# Altium PCB S203-RA.PcbDoc (part 2 of 2)
Units mm, origin at the board's own origin, x right, y up, seen from the top; angles counter-clockwise.
Board outline 500 x 12 mm, 2 copper layers (Component Side, Solder Side), stack 0.271 mm thick; 39 components, 86 nets, 212 pads, 204 vias.
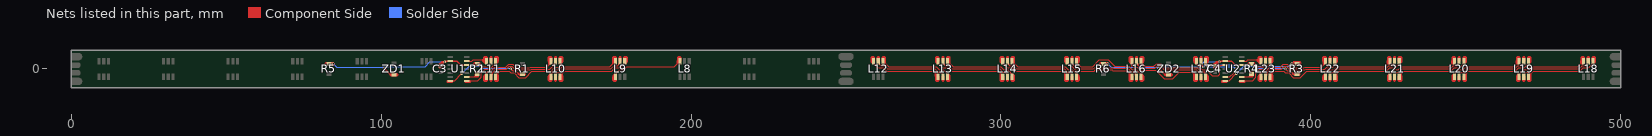
[diagram p2: the nets of this part, all layers, seen from the top]

## Via types
v1: diameter 0.8, hole 0.4, Component Side to Solder Side, 204 vias

## Nets (pads, with @x,y where several pads share a name; then routed paths per layer and width w, separated by ;. In a path a pad name is that pad's centre, name@x,y a point inside that pad or via, vN(x,y) a via of type N, cw(c..) or ccw(c..) an arc to the next point about the centre after c; other vN are vias at no path point) (continued)
NetL8_3: L8.3 L9.4 | length 29.2
  Component Side w0.35: L9.4@175.583,-2.487 cw(c177.814,-2.487) 176.237,-0.911 176.31,-0.838 cw(c177.603,-2.131) 177.603,-0.302 178.217,-0.302 179.205,0.686 194.59,0.686 195.563,1.658 ; 195.563,2.692 195.563,1.658 ; 195.896,1.991 cw(c196.188,1.699) L8.3@196.432,2.033 ; L8.3@196.101,2.09 cw(c195.606,2.212) 195.606,1.702 ; L8.3@196.172,1.702 195.606,1.702 ; L8.3@196.225,1.75 ccw(c195.944,1.364) 195.606,1.702 ; L8.3@196.417,2.513 196.051,2.147 195.606,1.702 ; 195.563,1.658 195.606,1.702
  Component Side w1: 175.051,-3.039 cw(c175.603,-3.039) L9.4@175.583,-2.487 ; 195.885,2.454 ccw(c196.318,2.454) L8.3@196.242,2.028 ; 195.885,3.647 ccw(c196.53,3.647) L8.3@196.417,3.013
NetL9_1: L9.1 L10.6 | length 27.2
  Component Side w0.35: L10.6@157.75,-2.2 158.614,-1.335 ; L10.6@157.766,-1.663 ccw(c157.821,-0.542) 158.614,-1.336 ; 158.422,-2.489 158.614,-2.297 158.614,-1.335 ; L9.1@178.583,1.798 L9.1@178.583,2.513 ; 179.115,2.658 cw(c178.321,2.658) 178.882,2.096 177.523,0.737 cw(c176.535,1.724) 176.535,0.328 175.437,0.328 174.41,-0.7 159.25,-0.7 158.614,-1.335
  Component Side w1: L10.6@157.75,-2.487 cw(c157.73,-3.039) 158.282,-3.039
NetL9_2: L9.2 L10.5 | length 24.8
  Component Side w0.35: L10.5@156.25,-2.487 156.25,-1.766 157.033,-0.982 157.792,-0.982 158.774,0 174.148,0 175.156,1.008 176.309,1.008 176.323,1.021 176.334,1.021 177.083,1.77 L9.2@177.083,2.513 ; 176.357,1.044 ccw(c175.388,2.013) L9.2@176.758,2.013
NetL9_3: L9.3 L10.4 | length 28.5
  Component Side w0.35: L10.4@154.75,-1.773 156.346,-0.178 157.508,-0.178 158.371,0.686 173.756,0.686 174.729,1.658 ; 174.729,2.692 174.729,1.658 ; 175.062,1.991 cw(c175.354,1.699) L9.3@175.598,2.033 ; L9.3@175.267,2.09 cw(c174.772,2.212) 174.772,1.702 ; L9.3@175.338,1.702 174.772,1.702 ; L9.3@175.391,1.75 ccw(c175.11,1.364) 174.772,1.702 ; L9.3@175.583,2.513 174.772,1.702 ; 174.729,1.658 174.772,1.702
  Component Side w1: 154.218,-3.039 cw(c154.77,-3.039) L10.4@154.75,-2.487 ; 175.051,2.454 ccw(c175.484,2.454) L9.3@175.408,2.028 ; 175.051,3.647 ccw(c175.696,3.647) L9.3@175.583,3.013
NetL10_1: L10.1 L11.6 | length 33.1
  Component Side w0.35: L11.6@136.917,-2.487 136.917,-1.783 137.94,-0.76 138.194,-0.76 ; L11.6@137.242,-1.987 cw(c138.52,-1.987) 137.616,-1.084 ; 137.43,-1.422 137.43,-1.981 137.582,-2.134 137.608,-2.108 137.608,-1.346 138.194,-0.76 ; 137.795,-2.287 137.795,-2.114 137.786,-2.105 137.786,-1.446 138.471,-0.76 ; L10.1@157.52,1.783 cw(c156.965,1.228) 157.75,1.228 cw(c158.535,1.228) L10.1@157.98,1.783 ; L10.1@157.75,2.513 157.75,1.159 157.093,0.502 156.029,0.502 154.801,-0.725 148.637,-0.725 146.571,-2.791 144.377,-2.791 142.88,-1.294 141.762,-1.294 141.228,-0.76 138.471,-0.76 ; 138.194,-0.76 138.471,-0.76
  Component Side w1: L11.6@136.917,-2.487 cw(c136.897,-3.039) 137.449,-3.039
NetL10_2: L10.2 L11.5 | length 27.8
  Component Side w0.35: L11.5@135.392,-1.987 cw(c136.129,-1.987) 135.608,-1.467 ; L11.5@135.417,-2.487 135.417,-1.657 137.014,-0.06 140.408,-0.06 141.373,0.905 142.123,0.905 142.962,0.066 143.514,0.066 143.905,-0.324 148.076,-0.324 148.356,-0.045 154.449,-0.045 156.25,1.756 L10.2@156.25,2.513 ; L11.5@135.742,-1.987 cw(c137.324,-1.987) 136.205,-0.869 ; 155.514,1.02 ccw(c154.521,2.013) L10.2@155.925,2.013
NetL10_3: L10.3 L11.4 | length 33.4
  Component Side w0.35: L11.4@133.698,-1.747 ccw(c133.248,-1.252) 133.917,-1.252 ; L11.4@133.917,-2.487 133.917,-1.252 ; L11.4@134.136,-1.747 cw(c134.586,-1.252) 133.917,-1.252 ; 154.093,1.337 cw(c154.795,1.337) L10.3@154.748,2.037 ; 154.093,1.711 cw(c154.77,1.711) L10.3@154.725,2.387 ; 154.093,2.085 cw(c154.745,2.085) L10.3@154.701,2.736 ; 154.093,2.363 154.093,1.193 ; 154.093,2.46 cw(c154.72,2.46) L10.3@154.678,3.085 ; L10.3@154.425,2.009 cw(c153.292,1.995) 154.093,1.193 ; L10.3@154.473,1.573 cw(c154.75,1.295) L10.3@154.75,1.687 ; L10.3@154.75,2.513 154.75,1.85 154.093,1.193 ; 133.917,-1.252 134.47,-0.7 135.377,-0.7 135.724,-0.352 135.728,-0.352 136.7,0.62 140.126,0.62 141.091,1.585 142.405,1.585 143.244,0.746 143.796,0.746 144.186,0.356 147.794,0.356 148.074,0.635 153.535,0.635 154.093,1.193
  Component Side w1: 133.385,-3.039 cw(c133.937,-3.039) L11.4@133.917,-2.487
NetL11_1: L11.1 U1.1 | length 13.6
  Component Side w0.35: U1.1@127.667,-3.81 131.207,-3.81 132.299,-2.718 132.299,-1.321 133.6,-0.02 135.095,-0.02 135.443,0.328 135.446,0.328 136.917,1.798 L11.1@136.917,2.513 ; U1.1@128.339,-3.911 cw(c128.583,-4.154) 128.583,-3.81 cw(c128.583,-3.466) U1.1@128.339,-3.709
NetL11_2: L11.2 R2.1 | length 14.6
  Component Side w0.35: R2.1@130.928,1.651 131.918,0.66 ; R2.1@131.064,1.191 cw(c131.064,0.41) 131.616,0.962 ; R2.1@131.093,1.192 cw(c131.175,-0.108) 132.096,0.813 131.766,1.143 ; R2.1@131.257,1.234 cw(c131.447,0.824) 131.766,1.143 ; R2.1@131.524,1.641 ccw(c132.871,1.613) 131.918,0.66 ; R2.1@131.639,2.108 131.766,1.981 ; L11.2@135.417,2.513 135.417,1.772 135.333,1.688 135.333,1.18 134.814,0.66 132.452,0.66 ; 131.766,1.143 131.766,1.981 ; 131.766,1.981 131.994,1.753 131.994,1.118 132.452,0.66 ; 131.918,0.66 132.452,0.66 ; R2.1@131.524,1.651 ccw(c132.167,1.651) 131.712,1.197 cw(c132.167,1.651) R2.1@131.524,1.651
  Component Side w1.2: 130.166,1.651 R2.1@130.928,1.651
NetL11_3: L11.3 U1.6 | length 13.3
  Component Side w0.35: U1.6@127.667,2.54 129.277,2.54 129.632,2.896 132.426,2.896 ; U1.6@128.339,2.439 cw(c128.583,2.196) 128.583,2.54 cw(c128.583,2.884) U1.6@128.339,2.641 ; 133.147,2.896 132.633,2.896 ; 133.409,3.672 133.385,3.648 132.633,2.896 ; L11.3@133.687,2.283 ccw(c133.132,1.728) 133.132,2.513 ccw(c133.132,3.297) L11.3@133.687,2.742 ; L11.3@133.917,2.513 133.397,2.513 ; 132.426,2.896 132.633,2.896 ; 132.426,2.896 132.809,2.513 133.016,2.513 ; 132.633,2.896 133.016,2.513 ; 133.016,2.513 133.397,2.513 ; 133.397,2.513 cw(c133.397,2.259) 133.625,2.37 ccw(c133.397,2.259) 133.397,2.513 ; 133.397,2.513 ccw(c133.397,2.766) 133.625,2.655 cw(c133.397,2.766) 133.397,2.513
  Component Side w1: 133.385,2.454 ccw(c133.818,2.454) L11.3@133.742,2.028 ; 133.385,3.647 ccw(c134.03,3.647) L11.3@133.917,3.013
NetL12_1: L12.1 L13.6 | length 29.2
  Component Side w0.35: L12.1@261.902,2.033 cw(c262.146,1.699) 262.438,1.991 ; L12.1@261.917,2.513 262.283,2.147 262.728,1.702 ; L12.1@262.109,1.75 cw(c262.39,1.364) 262.728,1.702 ; L12.1@262.162,1.702 262.728,1.702 ; L12.1@262.233,2.09 ccw(c262.728,2.212) 262.728,1.702 ; 262.771,2.692 262.771,1.658 ; L13.6@282.75,-2.487 ccw(c280.52,-2.487) 282.097,-0.911 282.024,-0.838 ccw(c280.731,-2.132) 280.731,-0.302 280.117,-0.302 279.129,0.686 263.744,0.686 262.771,1.658 ; 262.728,1.702 262.771,1.658
  Component Side w1: L12.1@261.917,3.013 ccw(c261.804,3.647) 262.449,3.647 ; L12.1@262.092,2.028 ccw(c262.016,2.454) 262.449,2.454 ; L13.6@282.75,-2.487 cw(c282.73,-3.039) 283.282,-3.039
NetL12_2: L12.2 L13.5 | length 24.8
  Component Side w0.35: L12.2@260.417,2.513 260.417,1.77 261.166,1.021 261.177,1.021 261.191,1.008 262.344,1.008 263.352,0 278.726,0 279.708,-0.982 280.467,-0.982 281.25,-1.766 L13.5@281.25,-2.487 ; L12.2@260.742,2.013 ccw(c262.112,2.013) 261.143,1.044
NetL12_3: L12.3 L13.4 | length 27.2
  Component Side w0.35: 258.385,2.658 ccw(c259.179,2.658) 258.618,2.096 259.977,0.737 ccw(c260.965,1.724) 260.965,0.328 262.063,0.328 263.09,-0.7 278.25,-0.7 278.886,-1.335 ; L12.3@258.917,1.798 L12.3@258.917,2.513 ; 279.078,-2.489 278.886,-2.297 278.886,-1.335 ; L13.4@279.734,-1.663 cw(c279.679,-0.542) 278.886,-1.336 ; L13.4@279.75,-2.2 278.886,-1.335
  Component Side w1: 279.218,-3.039 cw(c279.77,-3.039) L13.4@279.75,-2.487
NetL13_1: L13.1 L14.6 | length 29.2
  Component Side w0.35: L13.1@282.735,2.033 cw(c282.979,1.699) 283.271,1.991 ; L13.1@282.75,2.513 283.116,2.147 283.561,1.702 ; L13.1@282.942,1.75 cw(c283.223,1.364) 283.561,1.702 ; L13.1@282.995,1.702 283.561,1.702 ; L13.1@283.066,2.09 ccw(c283.561,2.212) 283.561,1.702 ; 283.604,2.692 283.604,1.658 ; L14.6@303.583,-2.487 ccw(c301.353,-2.487) 302.93,-0.911 302.857,-0.838 ccw(c301.564,-2.132) 301.564,-0.302 300.95,-0.302 299.962,0.686 284.577,0.686 283.604,1.658 ; 283.561,1.702 283.604,1.658
  Component Side w1: L13.1@282.75,3.013 ccw(c282.637,3.647) 283.282,3.647 ; L13.1@282.925,2.028 ccw(c282.849,2.454) 283.282,2.454 ; L14.6@303.583,-2.487 cw(c303.563,-3.039) 304.115,-3.039
NetL13_2: L13.2 L14.5 | length 24.8
  Component Side w0.35: L13.2@281.25,2.513 281.25,1.77 281.999,1.021 282.01,1.021 282.024,1.008 283.177,1.008 284.185,0 299.559,0 300.541,-0.982 301.3,-0.982 302.083,-1.766 L14.5@302.083,-2.487 ; L13.2@281.575,2.013 ccw(c282.945,2.013) 281.976,1.044
NetL13_3: L13.3 L14.4 | length 27.2
  Component Side w0.35: 279.218,2.658 ccw(c280.012,2.658) 279.451,2.096 280.81,0.737 ccw(c281.798,1.724) 281.798,0.328 282.896,0.328 283.923,-0.7 299.083,-0.7 299.719,-1.335 ; L13.3@279.75,1.798 L13.3@279.75,2.513 ; 299.911,-2.489 299.719,-2.297 299.719,-1.335 ; L14.4@300.567,-1.663 cw(c300.512,-0.542) 299.719,-1.336 ; L14.4@300.583,-2.2 299.719,-1.335
  Component Side w1: 300.051,-3.039 cw(c300.603,-3.039) L14.4@300.583,-2.487
NetL14_1: L14.1 L15.6 | length 29.2
  Component Side w0.35: L14.1@303.568,2.033 cw(c303.812,1.699) 304.104,1.991 ; L14.1@303.583,2.513 304.394,1.702 ; L14.1@303.775,1.75 cw(c304.056,1.364) 304.394,1.702 ; L14.1@303.828,1.702 304.394,1.702 ; L14.1@303.899,2.09 ccw(c304.394,2.212) 304.394,1.702 ; 304.437,2.692 304.437,1.658 ; L15.6@324.417,-2.487 324.417,-1.773 322.946,-0.302 321.783,-0.302 320.795,0.686 305.41,0.686 304.437,1.658 ; 304.394,1.702 304.437,1.658
  Component Side w1: L14.1@303.583,3.013 ccw(c303.47,3.647) 304.115,3.647 ; L14.1@303.758,2.028 ccw(c303.682,2.454) 304.115,2.454 ; L15.6@324.417,-2.487 cw(c324.397,-3.039) 324.949,-3.039
NetL14_2: L14.2 L15.5 | length 24.8
  Component Side w0.35: L14.2@302.083,2.513 302.083,1.77 302.832,1.021 302.843,1.021 302.857,1.008 304.01,1.008 305.018,0 320.392,0 321.374,-0.982 322.133,-0.982 322.916,-1.766 L15.5@322.917,-2.487 ; L14.2@302.408,2.013 ccw(c303.778,2.013) 302.809,1.044
NetL14_3: L14.3 L15.4 | length 27.2
  Component Side w0.35: 300.051,2.658 ccw(c300.845,2.658) 300.284,2.096 301.643,0.737 ccw(c302.631,1.724) 302.631,0.328 303.729,0.328 304.756,-0.7 319.916,-0.7 320.552,-1.335 ; L14.3@300.583,1.798 L14.3@300.583,2.513 ; 320.744,-2.489 320.552,-2.297 320.552,-1.335 ; L15.4@321.401,-1.663 cw(c321.345,-0.542) 320.552,-1.336 ; L15.4@321.416,-2.2 320.552,-1.335
  Component Side w1: 320.885,-3.039 cw(c321.437,-3.039) L15.4@321.417,-2.487
NetL15_1: L15.1 L16.6 | length 28.8
  Component Side w0.35: L15.1@324.417,1.688 cw(c324.417,0.733) 325.092,1.408 ; L15.1@324.417,2.513 324.417,2.083 325.19,1.31 ; L15.1@324.742,2.013 ccw(c325.356,2.013) 324.922,1.578 ; 325.19,2.601 325.19,1.31 ; L16.6@345.25,-2.487 345.25,-1.773 343.682,-0.205 342.992,-0.205 342.405,-0.205 341.336,0.864 336.732,0.864 334.674,2.921 331.821,2.921 329.586,0.686 325.814,0.686 325.19,1.31
  Component Side w1: L16.6@345.25,-2.487 cw(c345.23,-3.039) 345.782,-3.039
NetL15_2: L15.2 L16.5 | length 25.1
  Component Side w0.35: L15.2@322.917,2.513 322.917,1.798 324.71,0.006 329.867,0.006 330.211,0.35 336.284,0.35 336.45,0.184 340.949,0.184 342.042,-0.91 342.922,-0.91 343.75,-1.738 L16.5@343.75,-2.487 ; 343.019,-1.007 cw(c342.038,-1.987) L16.5@343.425,-1.987
NetL15_3: L15.3 L16.4 | length 28.6
  Component Side w0.35: L15.3@321.417,2.513 321.417,1.76 322.365,0.813 322.941,0.813 324.428,-0.674 330.149,-0.674 330.493,-0.33 336.002,-0.33 336.168,-0.496 340.596,-0.496 341.431,-1.331 ; L15.3@321.742,2.013 ccw(c323.135,2.013) 322.15,1.027 ; 341.431,-2.761 341.431,-1.331 ; L16.4@341.81,-1.71 cw(c341.533,-1.987) L16.4@341.925,-1.987 ; L16.4@342.246,-1.662 cw(c342.232,-0.529) 341.431,-1.331 ; L16.4@342.25,-2.487 342.25,-1.75 341.85,-1.75 341.431,-1.331
  Component Side w1: 341.718,-3.039 cw(c342.27,-3.039) L16.4@342.25,-2.487
NetL16_1: L16.1 L17.6 | length 33.5
  Component Side w0.35: L16.1@345.25,1.688 cw(c345.25,1.295) L16.1@345.527,1.573 ; L16.1@345.25,2.513 L16.1@345.25,2.189 ; L16.1@345.284,1.689 cw(c345.376,0.805) 346.005,1.434 ; L16.1@345.575,2.013 ccw(c346.752,2.013) 345.92,1.18 ; 346.005,2.588 346.005,1.434 ; L17.6@365.798,-1.831 ccw(c365.148,-1.474) 365.672,-0.95 ; L17.6@365.896,-1.722 ccw(c365.641,-1.361) 366.083,-1.361 ; 366.002,-1.28 cw(c365.574,-1.708) L17.6@366.105,-2 ; L17.6@366.083,-2.487 366.083,-1.361 ; L17.6@366.27,-1.722 cw(c366.525,-1.361) 366.083,-1.361 ; L16.1@345.25,2.189 346.005,1.434 ; L16.1@345.25,2.189 345.25,1.85 346.005,1.095 ; 346.005,1.095 346.223,0.877 346.561,0.877 ; 346.005,1.095 346.005,1.434 ; 346.005,1.434 346.561,0.877 ; 346.561,0.877 349.396,0.877 350.274,1.755 351.587,1.755 352.961,0.381 363.395,0.381 364.726,-0.95 365.672,-0.95 ; 365.672,-0.95 366.083,-1.361
  Component Side w1: L17.6@366.083,-2.487 cw(c366.063,-3.039) 366.615,-3.039
NetL16_2: L16.2 L17.5 | length 25.6
  Component Side w0.35: L16.2@343.75,2.513 343.75,1.756 345.309,0.197 349.678,0.197 350.555,1.075 351.305,1.075 352.679,-0.299 363.109,-0.299 364.583,-1.773 L17.5@364.583,-2.487 ; L16.2@344.075,2.013 ccw(c345.479,2.013) 344.486,1.02
NetL16_3: L16.3 L17.4 | length 32.4
  Component Side w0.35: L16.3@342.02,1.783 cw(c341.465,1.228) 342.25,1.228 cw(c343.035,1.228) L16.3@342.48,1.783 ; L16.3@342.25,2.513 342.25,0.947 342.697,0.5 343.974,0.5 344.956,-0.483 349.983,-0.483 352.7,-3.2 355.4,-3.2 357.621,-0.979 361.649,-0.979 ; 362.284,-2.667 362.284,-1.614 ; 362.525,-1.425 cw(c361.962,-1.987) L17.4@362.758,-1.987 ; 362.536,-1.436 ccw(c363.083,-0.889) L17.4@363.083,-1.662 ; L17.4@362.614,-1.944 362.284,-1.614 ; L17.4@362.925,-1.704 cw(c362.664,-1.234) 362.284,-1.614 ; L17.4@363.083,-2.487 363.083,-1.983 362.079,-0.979 361.649,-0.979 ; 361.649,-0.979 362.284,-1.614
  Component Side w1: 362.551,-3.039 cw(c363.103,-3.039) L17.4@363.083,-2.487
NetL17_1: L17.1 U2.13 | length 22.6
  Component Side w0.35: L17.1@365.853,1.783 cw(c365.298,1.228) 366.083,1.228 cw(c366.868,1.228) L17.1@366.313,1.783 ; L17.1@366.083,2.513 366.083,1.215 366.288,1.01 ; 366.242,1.055 ccw(c366.653,1.466) v1@366.653,0.885 ; 366.28,1.018 cw(c365.922,0.66) v1@366.428,0.66 ; v1@366.428,0.661 ccw(c365.95,0.662) 366.288,1 ; v1@366.428,0.664 ccw(c365.95,0.672) 366.288,1.01 ; v1@366.625,0.884 cw(c366.576,1.288) 366.288,1 ; v1@366.633,0.885 cw(c366.594,1.317) 366.288,1.01 ; v1(366.653,0.66) 366.653,0.635 366.288,1 ; U2.13@372.333,-2.54 373.866,-2.54 375.095,-1.311 375.095,-1.093 375.797,-0.391 375.797,-0.203 375.594,0 v1(375.797,0) ; U2.13@373.005,-2.641 cw(c373.249,-2.884) 373.249,-2.54 cw(c373.249,-2.196) U2.13@373.005,-2.439 ; 366.288,1 366.288,1.01
  Solder Side w0.35: v1(366.653,0.66) 366.672,0.68 366.951,0.68 366.956,0.676 375.121,0.676 v1(375.797,0) ; v1@366.812,0.501 cw(c367.233,0.081) 367.233,0.676 ; v1@366.812,0.819 ccw(c367.159,1.167) 367.159,0.676 ; v1@375.572,0 ccw(c375.029,0) 375.413,0.384 ccw(c375.797,0.768) v1@375.797,0.225
NetL17_2: L17.2 R3.1 | length 49.4
  Component Side w0.35: L17.2@364.372,1.765 cw(c363.982,1.308) 364.583,1.308 ; L17.2@364.583,2.513 364.583,1.308 ; 364.782,1.109 ccw(c365.383,1.71) v1@365.383,0.86 ; L17.2@364.794,1.765 ccw(c365.184,1.308) 364.583,1.308 ; v1(365.383,0.635) 365.346,0.598 365.293,0.598 364.583,1.308
  Component Side w0.6: v1@394.003,1.58 cw(c395.016,0.568) R3.1@395.016,2 ; R3.1@395.132,1.492 ccw(c394.281,1.032) 394.281,2 ; R3.1@395.19,1.414 ccw(c394.618,0.842) 394.618,1.651 ccw(c394.618,2.46) R3.1@395.19,1.888 ; R3.1@395.6,1.651 394.466,1.651 v1(393.932,1.651) 394.281,2 ; 396.472,1.651 396.124,2 394.281,2 ; 396.777,1.702 396.777,1.93 396.422,2.286 394.567,2.286 394.281,2
  Component Side w0.8: v1(393.932,1.651) cw(c394.122,0.901) 394.669,1.448 ; 394.466,1.651 394.669,1.448 ; R3.1@395.05,1.448 394.669,1.448 ; R3.1@395.224,1.768 cw(c394.669,2.088) 394.669,1.448
  Component Side w1.2: R3.1@395.6,1.651 396.472,1.651
  Solder Side w0.35: v1(365.383,0.635) 365.357,0.61 365.322,0.61 366.278,1.565 367.028,1.565 367.237,1.356 377.893,1.356 378.046,1.509 382.028,1.509 382.622,0.914 392.981,0.914 393.717,1.651 v1(393.932,1.651) ; v1@365.383,0.86 ccw(c365.383,1.318) 365.707,0.994 ; v1@365.608,0.635 cw(c366.236,0.635) 365.792,1.079 ; 393.181,1.115 cw(c393.932,0.363) v1@393.932,1.426
NetL17_3: L17.3 U2.10 | length 18.7
  Component Side w0.35: L17.3@363.033,1.691 cw(c362.961,1.231) 363.427,1.231 ; L17.3@363.083,3.263 L17.3@363.083,2.513 363.083,1.655 363.427,1.311 ; L17.3@363.087,2.037 cw(c363.025,1.64) L17.3@363.427,1.64 ; L17.3@363.362,1.845 ccw(c363.736,1.62) 363.427,1.311 ; L17.3@363.427,2.169 363.427,1.311 ; U2.10@371.661,1.169 ccw(c371.417,0.926) 371.417,1.27 ccw(c371.417,1.614) U2.10@371.661,1.371 ; U2.10@372.333,1.27 371.047,1.27 370.641,0.864 370.641,-1.702 370.082,-2.261 368.253,-2.261 366.262,-0.27 365.008,-0.27 363.427,1.311
NetL18_1: L18.1 L19.6 | length 27.2
  Component Side w0.35: L19.6@470.25,-2.2 471.114,-1.335 ; L19.6@470.266,-1.663 ccw(c470.321,-0.542) 471.114,-1.336 ; 470.922,-2.489 471.114,-2.297 471.114,-1.335 ; L18.1@491.083,1.798 L18.1@491.083,2.513 ; 491.615,2.658 cw(c490.821,2.658) 491.382,2.096 490.023,0.737 cw(c489.035,1.724) 489.035,0.328 487.937,0.328 486.91,-0.7 471.75,-0.7 471.114,-1.335
  Component Side w1: L19.6@470.25,-2.487 cw(c470.23,-3.039) 470.782,-3.039
NetL18_2: L18.2 L19.5 | length 24.8
  Component Side w0.35: L19.5@468.75,-2.487 468.75,-1.766 469.533,-0.982 470.292,-0.982 471.274,0 486.648,0 487.656,1.008 488.809,1.008 488.823,1.021 488.834,1.021 489.583,1.77 L18.2@489.583,2.513 ; 488.857,1.044 ccw(c487.888,2.013) L18.2@489.258,2.013
NetL18_3: L18.3 L19.4 | length 29.2
  Component Side w0.35: L19.4@467.25,-2.487 cw(c469.48,-2.487) 467.903,-0.911 467.976,-0.838 cw(c469.269,-2.131) 469.269,-0.302 469.883,-0.302 470.871,0.686 486.256,0.686 487.229,1.658 ; 487.229,2.692 487.229,1.658 ; 487.562,1.991 cw(c487.854,1.699) L18.3@488.098,2.033 ; L18.3@487.767,2.09 cw(c487.272,2.212) 487.272,1.702 ; L18.3@487.838,1.702 487.272,1.702 ; L18.3@487.891,1.75 ccw(c487.61,1.364) 487.272,1.702 ; L18.3@488.083,2.513 487.717,2.147 487.272,1.702 ; 487.229,1.658 487.272,1.702
  Component Side w1: 466.718,-3.039 cw(c467.27,-3.039) L19.4@467.25,-2.487 ; 487.551,2.454 ccw(c487.984,2.454) L18.3@487.908,2.028 ; 487.551,3.647 ccw(c488.196,3.647) L18.3@488.083,3.013
NetL19_1: L19.1 L20.6 | length 27.2
  Component Side w0.35: L20.6@449.417,-2.2 450.281,-1.335 ; L20.6@449.433,-1.663 ccw(c449.488,-0.542) 450.281,-1.336 ; 450.089,-2.489 450.281,-2.297 450.281,-1.335 ; L19.1@470.25,1.798 L19.1@470.25,2.513 ; 470.782,2.658 cw(c469.988,2.658) 470.549,2.096 469.19,0.737 cw(c468.202,1.724) 468.202,0.328 467.104,0.328 466.077,-0.7 450.917,-0.7 450.281,-1.335
  Component Side w1: L20.6@449.417,-2.487 cw(c449.397,-3.039) 449.949,-3.039
NetL19_2: L19.2 L20.5 | length 24.8
  Component Side w0.35: L20.5@447.917,-2.487 447.917,-1.766 448.7,-0.982 449.459,-0.982 450.441,0 465.815,0 466.823,1.008 467.976,1.008 467.99,1.021 468.001,1.021 468.75,1.77 L19.2@468.75,2.513 ; 468.024,1.044 ccw(c467.055,2.013) L19.2@468.425,2.013
NetL19_3: L19.3 L20.4 | length 29.2
  Component Side w0.35: L20.4@446.417,-2.487 cw(c448.647,-2.487) 447.07,-0.911 447.143,-0.838 cw(c448.436,-2.131) 448.436,-0.302 449.05,-0.302 450.038,0.686 465.423,0.686 466.396,1.658 ; 466.396,2.692 466.396,1.658 ; 466.729,1.991 cw(c467.021,1.699) L19.3@467.265,2.033 ; L19.3@466.934,2.09 cw(c466.439,2.212) 466.439,1.702 ; L19.3@467.005,1.702 466.439,1.702 ; L19.3@467.058,1.75 ccw(c466.777,1.364) 466.439,1.702 ; L19.3@467.25,2.513 466.884,2.147 466.439,1.702 ; 466.396,1.658 466.439,1.702
  Component Side w1: 445.885,-3.039 cw(c446.437,-3.039) L20.4@446.417,-2.487 ; 466.718,2.454 ccw(c467.151,2.454) L19.3@467.075,2.028 ; 466.718,3.648 ccw(c467.363,3.648) L19.3@467.25,3.013
NetL20_1: L20.1 L21.6 | length 27.2
  Component Side w0.35: L21.6@428.584,-2.2 429.448,-1.335 ; L21.6@428.599,-1.663 ccw(c428.655,-0.542) 429.448,-1.336 ; 429.256,-2.489 429.448,-2.297 429.448,-1.335 ; L20.1@449.417,1.798 L20.1@449.417,2.513 ; 449.949,2.658 cw(c449.155,2.658) 449.716,2.096 448.357,0.737 cw(c447.369,1.724) 447.369,0.328 446.271,0.328 445.244,-0.7 430.084,-0.7 429.448,-1.335
  Component Side w1: L21.6@428.583,-2.487 cw(c428.563,-3.039) 429.115,-3.039
NetL20_2: L20.2 L21.5 | length 24.8
  Component Side w0.35: L21.5@427.084,-2.487 427.084,-1.766 427.867,-0.982 428.626,-0.982 429.608,0 444.982,0 445.99,1.008 447.143,1.008 447.157,1.021 447.168,1.021 447.917,1.77 L20.2@447.917,2.513 ; 447.191,1.044 ccw(c446.222,2.013) L20.2@447.592,2.013
NetL20_3: L20.3 L21.4 | length 29.2
  Component Side w0.35: L21.4@425.583,-2.487 cw(c427.814,-2.487) 426.237,-0.911 426.31,-0.838 cw(c427.603,-2.131) 427.603,-0.302 428.217,-0.302 429.205,0.686 444.59,0.686 445.563,1.658 ; 445.563,2.692 445.563,1.658 ; 445.896,1.991 cw(c446.188,1.699) L20.3@446.432,2.033 ; L20.3@446.101,2.09 cw(c445.606,2.212) 445.606,1.702 ; L20.3@446.172,1.702 445.606,1.702 ; L20.3@446.225,1.75 ccw(c445.944,1.364) 445.606,1.702 ; L20.3@446.417,2.513 446.051,2.147 445.606,1.702 ; 445.563,1.658 445.606,1.702
  Component Side w1: 425.051,-3.039 cw(c425.603,-3.039) L21.4@425.583,-2.487 ; 445.885,2.454 ccw(c446.318,2.454) L20.3@446.242,2.028 ; 445.885,3.647 ccw(c446.53,3.647) L20.3@446.417,3.013
NetL21_1: L21.1 L22.6 | length 27.2
  Component Side w0.35: L22.6@407.75,-2.2 408.614,-1.335 ; L22.6@407.766,-1.663 ccw(c407.821,-0.542) 408.614,-1.336 ; 408.422,-2.489 408.614,-2.297 408.614,-1.335 ; L21.1@428.583,1.798 L21.1@428.583,2.513 ; 429.115,2.658 cw(c428.321,2.658) 428.882,2.096 427.523,0.737 cw(c426.535,1.724) 426.535,0.328 425.437,0.328 424.41,-0.7 409.25,-0.7 408.614,-1.335
  Component Side w1: L22.6@407.75,-2.487 cw(c407.73,-3.039) 408.282,-3.039
NetL21_2: L21.2 L22.5 | length 24.8
  Component Side w0.35: L22.5@406.25,-2.487 406.25,-1.766 407.033,-0.982 407.792,-0.982 408.774,0 424.148,0 425.156,1.008 426.309,1.008 426.323,1.021 426.334,1.021 427.083,1.77 L21.2@427.083,2.513 ; 426.357,1.044 ccw(c425.388,2.013) L21.2@426.758,2.013
NetL21_3: L21.3 L22.4 | length 29.2
  Component Side w0.35: L22.4@404.75,-2.487 404.75,-1.773 406.32,-0.203 407.482,-0.203 408.371,0.686 423.756,0.686 424.729,1.658 ; 424.729,2.692 424.729,1.658 ; 425.062,1.991 cw(c425.354,1.699) L21.3@425.598,2.033 ; L21.3@425.267,2.09 cw(c424.772,2.212) 424.772,1.702 ; L21.3@425.338,1.702 424.772,1.702 ; L21.3@425.391,1.75 ccw(c425.11,1.364) 424.772,1.702 ; L21.3@425.583,2.513 424.772,1.702 ; 424.729,1.658 424.772,1.702
  Component Side w1: 404.218,-3.039 cw(c404.77,-3.039) L22.4@404.75,-2.487 ; 425.051,2.454 ccw(c425.484,2.454) L21.3@425.408,2.028 ; 425.051,3.647 ccw(c425.696,3.647) L21.3@425.583,3.013
NetL22_1: L22.1 L23.6 | length 33.1
  Component Side w0.35: L23.6@386.917,-2.487 386.917,-1.783 387.94,-0.76 388.194,-0.76 ; L23.6@387.242,-1.987 cw(c388.52,-1.987) 387.616,-1.084 ; 387.43,-1.422 387.43,-1.981 387.582,-2.134 387.608,-2.108 387.608,-1.346 388.194,-0.76 ; 387.795,-2.287 387.795,-2.114 387.786,-2.105 387.786,-1.446 388.471,-0.76 ; L22.1@407.52,1.783 cw(c406.965,1.228) 407.75,1.228 cw(c408.535,1.228) L22.1@407.98,1.783 ; L22.1@407.75,2.513 407.75,1.223 407.027,0.5 406.026,0.5 404.801,-0.725 398.637,-0.725 396.571,-2.791 394.377,-2.791 392.88,-1.294 391.762,-1.294 391.228,-0.76 388.471,-0.76 ; 388.194,-0.76 388.471,-0.76
  Component Side w1: L23.6@386.917,-2.487 cw(c386.897,-3.039) 387.449,-3.039
NetL22_2: L22.2 L23.5 | length 27.8
  Component Side w0.35: L23.5@385.392,-1.987 cw(c386.129,-1.987) 385.608,-1.467 ; L23.5@385.417,-2.487 385.417,-1.657 387.014,-0.06 390.408,-0.06 391.373,0.905 392.123,0.905 392.962,0.066 393.514,0.066 393.905,-0.324 398.076,-0.324 398.356,-0.045 404.449,-0.045 406.25,1.756 L22.2@406.25,2.513 ; L23.5@385.742,-1.987 cw(c387.324,-1.987) 386.205,-0.869 ; 405.514,1.02 ccw(c404.521,2.013) L22.2@405.925,2.013
NetL22_3: L22.3 L23.4 | length 33.4
  Component Side w0.35: L23.4@383.698,-1.747 ccw(c383.248,-1.252) 383.917,-1.252 ; L23.4@383.917,-2.487 383.917,-1.252 ; L23.4@384.136,-1.747 cw(c384.586,-1.252) 383.917,-1.252 ; 404.093,1.337 cw(c404.795,1.337) L22.3@404.748,2.037 ; 404.093,1.711 cw(c404.77,1.711) L22.3@404.725,2.387 ; 404.093,2.085 cw(c404.745,2.085) L22.3@404.701,2.736 ; 404.093,2.363 404.093,1.193 ; 404.093,2.46 cw(c404.72,2.46) L22.3@404.678,3.085 ; L22.3@404.425,2.009 cw(c403.292,1.995) 404.093,1.193 ; L22.3@404.473,1.573 cw(c404.75,1.295) L22.3@404.75,1.687 ; L22.3@404.75,2.513 404.75,1.85 404.093,1.193 ; 383.917,-1.252 384.47,-0.7 385.377,-0.7 385.724,-0.352 385.728,-0.352 386.7,0.62 390.126,0.62 391.091,1.585 392.405,1.585 393.244,0.746 393.796,0.746 394.186,0.356 397.794,0.356 398.074,0.635 403.535,0.635 404.093,1.193
  Component Side w1: 383.385,-3.039 cw(c383.937,-3.039) L23.4@383.917,-2.487
NetL23_1: L23.1 U2.1 | length 13.6
  Component Side w0.35: U2.1@377.667,-3.81 381.207,-3.81 382.299,-2.718 382.299,-1.321 383.6,-0.02 385.095,-0.02 385.443,0.328 385.446,0.328 386.917,1.798 L23.1@386.917,2.513 ; U2.1@378.339,-3.911 cw(c378.583,-4.154) 378.583,-3.81 cw(c378.583,-3.466) U2.1@378.339,-3.709
NetL23_2: L23.2 R4.1 | length 14.6
  Component Side w0.35: R4.1@380.928,1.651 381.918,0.66 382.452,0.66 ; R4.1@381.025,1.191 cw(c381.025,0.317) 381.644,0.935 ; R4.1@381.063,1.193 cw(c381.169,-0.114) 382.096,0.813 381.766,1.143 ; R4.1@381.224,1.236 cw(c381.429,0.806) 381.766,1.143 ; R4.1@381.639,2.108 381.766,1.981 ; 381.88,0.699 cw(c382.832,1.651) R4.1@381.485,1.651 ; L23.2@385.417,2.513 385.417,1.772 385.333,1.688 385.333,1.18 384.814,0.66 382.452,0.66 ; R4.1@381.485,1.651 ccw(c382.035,1.651) 381.646,1.262 cw(c382.035,1.651) R4.1@381.485,1.651 ; 381.766,1.143 381.766,1.981 ; 381.766,1.981 381.994,1.753 381.994,1.118 382.452,0.66
  Component Side w1.2: R4.1@380.166,1.651 R4.1@380.928,1.651
NetL23_3: L23.3 U2.6 | length 13.3
  Component Side w0.35: U2.6@377.667,2.54 379.277,2.54 379.632,2.896 382.426,2.896 ; U2.6@378.339,2.439 cw(c378.583,2.196) 378.583,2.54 cw(c378.583,2.884) U2.6@378.339,2.641 ; 383.147,2.896 382.633,2.896 ; 383.409,3.672 383.385,3.648 382.633,2.896 ; L23.3@383.687,2.283 ccw(c383.132,1.728) 383.132,2.513 ccw(c383.132,3.297) L23.3@383.687,2.742 ; L23.3@383.917,2.513 383.397,2.513 ; 382.426,2.896 382.809,2.513 383.016,2.513 ; 382.426,2.896 382.633,2.896 ; 382.633,2.896 383.016,2.513 ; 383.016,2.513 383.397,2.513 ; 383.397,2.513 cw(c383.397,2.259) 383.625,2.37 ccw(c383.397,2.259) 383.397,2.513 ; 383.397,2.513 ccw(c383.397,2.766) 383.625,2.655 cw(c383.397,2.766) 383.397,2.513
  Component Side w1: 383.385,2.454 ccw(c383.818,2.454) L23.3@383.742,2.028 ; 383.385,3.647 ccw(c384.03,3.647) L23.3@383.917,3.013
NetR1_2: R1.2 U1.14 | length 40.4
  Component Side w0.35: U1.14@122.333,-3.81 123.638,-3.81 126,-1.448 v1(126.025,-1.473) ; U1.14@123.005,-3.911 cw(c123.249,-4.154) 123.249,-3.81 cw(c123.249,-3.466) U1.14@123.005,-3.709 ; v1@141.748,-0.225 cw(c141.748,-0.768) 142.132,-0.384 cw(c142.516,0) v1@141.973,0 ; v1(141.748,0) 142.362,-0.614 143.233,-0.614 143.898,-1.279 ; 144.547,-1.279 cw(c144.547,-2.238) R1.2@145.348,-1.711 ; 144.737,-1.482 ccw(c144.737,-0.948) 145.115,-1.326 cw(c144.33,-0.54) 144.33,-1.651 cw(c144.33,-2.762) 145.115,-1.976 ccw(c144.781,-2.31) 144.781,-1.838 ; R1.2@145.018,-1.469 cw(c144.457,-1.227) 144.457,-1.838 ; R1.2@145.056,-1.904 ccw(c143.898,-2.665) 143.898,-1.279 ; R1.2@145.087,-1.945 ccw(c144.101,-2.763) 144.101,-1.482 ; R1.2@145.194,-2.057 144.676,-2.057 144.457,-1.838 ; R1.2@145.228,-1.279 143.898,-1.279 ; R1.2@145.396,-1.838 144.457,-1.838 ; R1.2@145.431,-1.482 144.101,-1.482 ; R1.2@145.6,-1.651 144.27,-1.651 ; 143.898,-1.279 144.101,-1.482 ; 144.101,-1.482 144.27,-1.651 ; 144.27,-1.651 144.457,-1.838
  Component Side w1.2: R1.2@145.6,-1.651 R1.2@146.142,-1.651
  Solder Side w0.35: v1(126.025,-1.473) 128.327,0.829 131.746,0.829 132.358,0.217 141.531,0.217 v1(141.748,0) ; v1@126.025,-1.248 ccw(c126.025,-0.705) 126.409,-1.089 ccw(c126.794,-1.473) v1@126.25,-1.473
NetR2_2: R2.2 U1.2 | length 11.6
  Component Side w0.35: U1.2@127.667,-2.54 130.039,-2.54 ; U1.2@128.339,-2.641 cw(c128.583,-2.884) 128.583,-2.54 cw(c128.583,-2.196) U1.2@128.339,-2.439 ; 130.225,-2.353 cw(c130.81,-2.938) R2.2@130.81,-2.111 ; R2.2@130.352,-1.688 cw(c129.275,-1.776) 130.039,-2.54 ; 130.445,-2.388 131.385,-2.388 ; 130.572,-0.94 131.512,-0.94 ; R2.2@131.512,-2.261 131.385,-2.388 ; R2.2@131.512,-1.143 131.512,-0.94 ; 130.039,-2.54 131.232,-2.54 131.385,-2.388 ; 130.039,-2.54 130.928,-1.651 130.343,-1.067 130.343,-0.975 130.501,-0.818 131.39,-0.818 131.512,-0.94
NetR3_2: R3.2 U2.14 | length 40.4
  Component Side w0.35: U2.14@372.333,-3.81 373.638,-3.81 376,-1.448 v1(376.025,-1.473) ; U2.14@373.005,-3.911 cw(c373.249,-4.154) 373.249,-3.81 cw(c373.249,-3.466) U2.14@373.005,-3.709 ; v1@391.748,-0.225 cw(c391.748,-0.768) 392.132,-0.384 cw(c392.516,0) v1@391.973,0 ; v1(391.748,0) 392.362,-0.614 393.233,-0.614 393.898,-1.279 ; 394.541,-1.279 cw(c394.541,-2.224) R3.2@395.335,-1.711 ; 394.724,-1.482 ccw(c394.724,-0.948) 395.102,-1.326 cw(c394.317,-0.54) 394.317,-1.651 cw(c394.317,-2.762) 395.102,-1.976 ccw(c394.768,-2.31) 394.768,-1.838 ; R3.2@395.003,-1.474 cw(c394.457,-1.247) 394.457,-1.838 ; R3.2@395.041,-1.901 ccw(c393.898,-2.641) 393.898,-1.279 ; R3.2@395.071,-1.942 ccw(c394.101,-2.735) 394.101,-1.482 ; R3.2@395.194,-2.057 394.676,-2.057 394.457,-1.838 ; R3.2@395.228,-1.279 393.898,-1.279 ; R3.2@395.396,-1.838 394.457,-1.838 ; R3.2@395.431,-1.482 394.101,-1.482 ; R3.2@395.6,-1.651 394.27,-1.651 ; 393.898,-1.279 394.101,-1.482 ; 394.101,-1.482 394.27,-1.651 ; 394.27,-1.651 394.457,-1.838
  Component Side w1.2: R3.2@395.6,-1.651 R3.2@396.142,-1.651
  Solder Side w0.35: v1(376.025,-1.473) 378.327,0.829 381.746,0.829 382.358,0.217 391.531,0.217 v1(391.748,0) ; v1@376.025,-1.248 ccw(c376.025,-0.705) 376.409,-1.089 ccw(c376.794,-1.473) v1@376.25,-1.473
NetR4_2: R4.2 U2.2 | length 11.5
  Component Side w0.35: U2.2@377.667,-2.54 380.039,-2.54 ; U2.2@378.339,-2.641 cw(c378.583,-2.884) 378.583,-2.54 cw(c378.583,-2.196) U2.2@378.339,-2.439 ; 380.253,-2.326 cw(c380.771,-2.844) R4.2@380.771,-2.111 ; R4.2@380.316,-1.714 cw(c379.347,-1.849) 380.039,-2.54 ; 380.445,-2.388 381.385,-2.388 ; 380.572,-0.94 381.512,-0.94 ; R4.2@381.512,-2.261 381.385,-2.388 ; R4.2@381.512,-1.143 381.512,-0.94 ; 380.039,-2.54 380.928,-1.651 380.343,-1.067 380.343,-0.975 380.501,-0.818 381.39,-0.818 381.512,-0.94 ; 380.039,-2.54 381.232,-2.54 381.385,-2.388
VCC1: C3.1 R5.2 U1.5 U1.9 ZD1.2 | length 85.1
  Component Side w0.5: C3.1@119.102,1.332 ccw(c118.962,2.057) 119.701,2.057 ; C3.1@119.164,1.338 ccw(c119.164,2.184) 119.762,1.586 ; C3.1@119.197,0.841 ccw(c119.079,1.451) C3.1@119.701,1.451 ; C3.1@119.47,1.113 cw(c120.363,1.395) 119.701,2.057 ; C3.1@119.485,1.016 cw(c120.19,1.016) C3.1@119.692,1.515 ; 119.701,2.108 119.701,2.057 ; 119.777,2.134 119.701,2.057 ; v1@120.543,2.155 cw(c121.474,1.224) U1.9@121.474,2.54 ; U1.5@127.667,1.27 125.67,1.27 124.4,2.54 U1.9@122.333,2.54 120.717,2.54 v1(120.437,2.261) ; C3.1@119.701,1.524 119.701,0.559 119.574,0.432 118.863,0.432 118.736,0.559 118.736,1.524 119.472,2.261 v1(120.437,2.261) ; C3.1@119.701,1.524 119.701,2.057 ; C3.1@119.701,1.524 v1(120.437,2.261) ; C3.1@119.701,1.524 119.193,1.016 119.193,1.549 119.701,2.057
  Component Side w0.6: R5.2@83.2,1.651 v1(84.549,1.651) ; R5.2@83.464,1.414 cw(c84.036,0.842) 84.036,1.651 cw(c84.036,2.46) R5.2@83.464,1.888 ; v1(100.93,0.17) 102.726,-1.626 ; 102.755,-1.626 cw(c102.755,-2.945) ZD1.2@103.688,-2.012 ; ZD1.2@103.677,-1.599 cw(c103,-0.988) 103,-1.9 ; ZD1.2@104.207,-1.626 102.726,-1.626 ; ZD1.2@104.3,-1.9 103,-1.9 ; ZD1.2@104.334,-2.184 103.284,-2.184 103,-1.9 ; 102.726,-1.626 103,-1.9
  Component Side w0.8: R5.2@83.353,1.422 v1@84.32,1.422 ; R5.2@83.396,1.488 cw(c84.32,0.594) v1@84.32,1.88 ; R5.2@83.396,1.814 ccw(c84.32,2.708) v1@84.32,1.422 ; R5.2@83.557,1.88 v1@84.32,1.88 ; 83.997,1.422 ccw(c83.997,2.203) v1(84.549,1.651) ; 83.997,1.88 cw(c83.997,1.099) v1(84.549,1.651) ; v1@84.32,1.422 v1(84.549,1.651) ; v1@84.32,1.88 v1(84.549,1.651)
  Component Side w1.2: 82.312,1.651 R5.2@83.2,1.651 ; ZD1.2@104.3,-1.9 105.015,-1.9
  Solder Side w0.35: v1(100.93,0.17) 100.932,0.172 101.251,0.172 101.815,0.737 ; v1@100.939,0.395 ccw(c100.987,1.564) 101.815,0.737 ; v1@120.278,2.102 ccw(c119.894,1.717) 119.894,2.261 ccw(c119.894,2.804) v1@120.278,2.42 ; v1(120.437,2.261) 115.688,2.261 114.164,0.737 101.815,0.737
  Solder Side w0.4: v1@84.549,1.451 cw(c84.549,0.968) 84.89,1.31 cw(c85.232,1.651) v1@84.749,1.651 ; v1(84.549,1.651) 85.641,0.559 100.258,0.559 ; 100.715,0.559 cw(c100.715,0.141) v1@101.128,0.196 ; v1@100.732,0.144 ccw(c100.258,0.081) 100.258,0.559 ; v1@100.731,0.188 cw(c101.137,0.151) 101.137,0.559 ; v1@100.892,0.366 cw(c100.756,1.056) 100.258,0.559 ; v1(100.93,0.17) 100.647,0.17 100.258,0.559 ; v1@101.129,0.152 cw(c101.575,0.112) 101.575,0.559 100.258,0.559
VCC2: C4.1 R6.2 U2.5 U2.9 ZD2.2 | length 85.1
  Component Side w0.5: C4.1@369.102,1.332 ccw(c368.962,2.057) 369.701,2.057 ; C4.1@369.164,1.338 ccw(c369.164,2.184) 369.762,1.586 ; C4.1@369.197,0.841 ccw(c369.079,1.451) C4.1@369.701,1.451 ; C4.1@369.47,1.113 cw(c370.363,1.395) 369.701,2.057 ; C4.1@369.485,1.016 cw(c370.19,1.016) C4.1@369.692,1.515 ; 369.701,2.108 369.701,2.057 ; 369.777,2.134 369.701,2.057 ; v1@370.543,2.155 cw(c371.474,1.224) U2.9@371.474,2.54 ; U2.5@377.667,1.27 375.67,1.27 374.4,2.54 U2.9@372.333,2.54 370.717,2.54 v1(370.437,2.261) ; C4.1@369.701,1.524 369.193,1.016 369.193,1.549 369.701,2.057 ; C4.1@369.701,1.524 v1(370.437,2.261) ; C4.1@369.701,1.524 369.701,2.057 ; C4.1@369.701,1.524 369.701,0.559 369.574,0.432 368.863,0.432 368.736,0.559 368.736,1.524 369.472,2.261 v1(370.437,2.261)
  Component Side w0.6: R6.2@333.2,1.651 v1(334.549,1.651) ; R6.2@333.464,1.414 cw(c334.036,0.842) 334.036,1.651 cw(c334.036,2.46) R6.2@333.464,1.888 ; v1(350.93,0.17) 352.726,-1.626 ; 352.755,-1.626 cw(c352.755,-2.945) ZD2.2@353.688,-2.012 ; ZD2.2@353.677,-1.599 cw(c353,-0.988) 353,-1.9 ; ZD2.2@354.207,-1.626 352.726,-1.626 ; ZD2.2@354.3,-1.9 353,-1.9 ; ZD2.2@354.334,-2.184 353.284,-2.184 353,-1.9 ; 352.726,-1.626 353,-1.9
  Component Side w0.8: R6.2@333.353,1.422 v1@334.32,1.422 ; R6.2@333.396,1.488 cw(c334.32,0.594) v1@334.32,1.88 ; R6.2@333.396,1.814 ccw(c334.32,2.708) v1@334.32,1.422 ; R6.2@333.557,1.88 v1@334.32,1.88 ; 333.997,1.422 ccw(c333.997,2.203) v1(334.549,1.651) ; 333.997,1.88 cw(c333.997,1.099) v1(334.549,1.651) ; v1@334.32,1.422 v1(334.549,1.651) ; v1@334.32,1.88 v1(334.549,1.651)
  Component Side w1.2: 332.312,1.651 R6.2@333.2,1.651 ; ZD2.2@354.3,-1.9 355.015,-1.9
  Solder Side w0.35: v1(350.93,0.17) 350.932,0.172 351.251,0.172 351.815,0.737 ; v1@350.939,0.395 ccw(c350.987,1.564) 351.815,0.737 ; v1@370.278,2.102 ccw(c369.894,1.717) 369.894,2.261 ccw(c369.894,2.804) v1@370.278,2.42 ; v1(370.437,2.261) 365.688,2.261 364.164,0.737 351.815,0.737
  Solder Side w0.4: v1@334.549,1.451 cw(c334.549,0.968) 334.89,1.31 cw(c335.232,1.651) v1@334.749,1.651 ; v1(334.549,1.651) 335.641,0.559 350.258,0.559 ; 350.715,0.559 cw(c350.715,0.141) v1@351.128,0.196 ; v1@350.731,0.188 cw(c351.137,0.151) 351.137,0.559 ; v1@350.732,0.144 ccw(c350.258,0.081) 350.258,0.559 ; v1@350.892,0.366 cw(c350.756,1.056) 350.258,0.559 ; v1(350.93,0.17) 350.647,0.17 350.258,0.559 ; v1@351.129,0.152 cw(c351.575,0.112) 351.575,0.559 350.258,0.559

## Polygon pours and split planes (outlines as drawn)
GND on Component Side "Solder Side-No Net" (solid, remove dead copper, pour order 18): 367.083,0.5 370.5,0.5 370.5,-1.842 370.361,-1.981 370.082,-2.261 369,-2.261 368.262,-2.261 368.033,-2.032 366.672,-0.671 366.672,0.68 367.496,0.68 367.5,0.676
GND on Component Side "Solder Side-No Net" (solid, remove dead copper, pour order 16): 117.083,1 117.219,0.864 120.641,0.864 120.641,-1.702 120.342,-2 120.082,-2.261 119.5,-2.261 118.253,-2.261 117.083,-1.091 117.083,-1 117.083,1
GND on Component Side "Solder Side-No Net" (solid, remove dead copper, pour order 13): 0,5.8 500,5.8 500,2.8 497.5,2.8 495,0.3 494.6,0.3 5,0.3 2.5,2.8 0,2.8 0,5.8
+24V on Component Side "Solder Side-No Net" (solid, remove dead copper, pour order 10): 0,-5.8 500,-5.8 500,-2.8 497.5,-2.8 495,-0.3 494,-0.3 4.9,-0.3 2.4,-2.8 0,-2.8 0,-5.8
GND on Solder Side "Solder Side-No Net" (solid, remove dead copper, pour order 13): 0,5.8 500,5.8 500,2.8 497.5,2.8 495,0.3 494.6,0.3 5,0.3 2.5,2.8 0,2.8 0,5.8
+24V on Solder Side "Solder Side-No Net" (solid, remove dead copper, pour order 10): 0,-5.8 500,-5.8 500,-2.8 497.5,-2.8 495,-0.3 494,-0.3 4.9,-0.3 2.4,-2.8 0,-2.8 0,-5.8

## Silkscreen, mask and mechanical layers (free items; w line width, h text height)
Top Overlay:
  lines w0.1: 1,-2.7 1,-2.3 ; 1,-0.2 1,0.2 ; 1,2.3 1,2.7 ; 499,-2.7 499,-2.3 ; 499,-0.2 499,0.2 ; 499,2.3 499,2.7
  lines w0.254: 57.775,-0.875 57.775,0.875 64.45,0.875 64.45,1.85 66.3,0 64.45,-1.85 64.45,-0.875 57.775,-0.875 ; 183.175,-0.875 189.85,-0.875 189.85,-1.85 191.7,0 189.85,1.85 189.85,0.875 183.175,0.875 183.175,-0.875 ; 307.875,-0.875 307.875,0.875 314.55,0.875 314.55,1.85 316.4,0 314.55,-1.85 314.55,-0.875 307.875,-0.875 ; 433.175,-0.875 433.175,0.875 439.85,0.875 439.85,1.85 441.7,0 439.85,-1.85 439.85,-0.875 433.175,-0.875
  text "GND" at 3.775,4.325 h1
  text "GND" at 493.6,4.275 h1
  text "DTI" at 3.8,0.7 h1
  text "DTO" at 493.65,0.65 h1
  text "REV.A" at 8.6,-0.5 h1
  text "CKI" at 3.775,-1.725 h1
  text "CKO" at 493.65,-2.05 h1
  text "+24V" at 3.825,-5.5 h1
  text "+24V" at 492.963,-5.563 h1
Mechanical 1:
  the board outline again, w0.1
Mechanical 2:
  lines w0.1: -4,0 253.5,0 ; 246,0 503.5,0